# EAGLE board up_down_buttons (EAGLE 7.2.0)
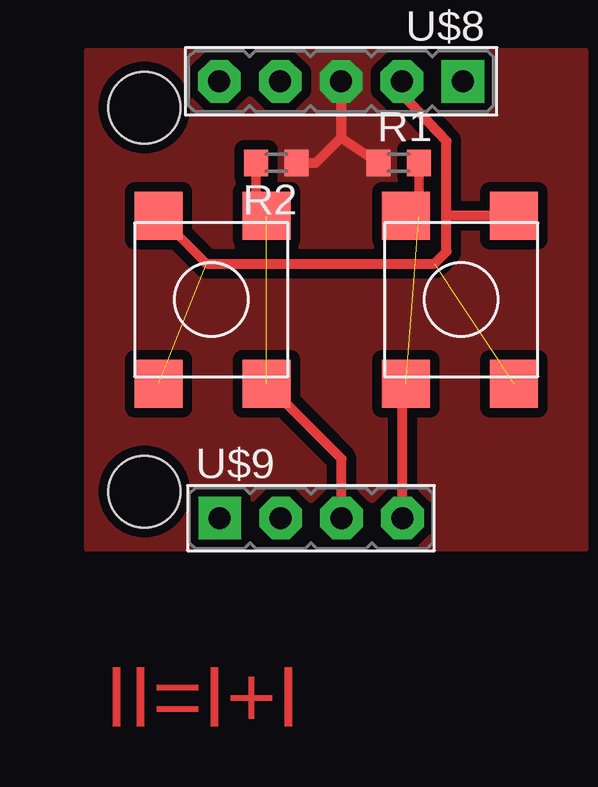
[diagram p0: board, top side]
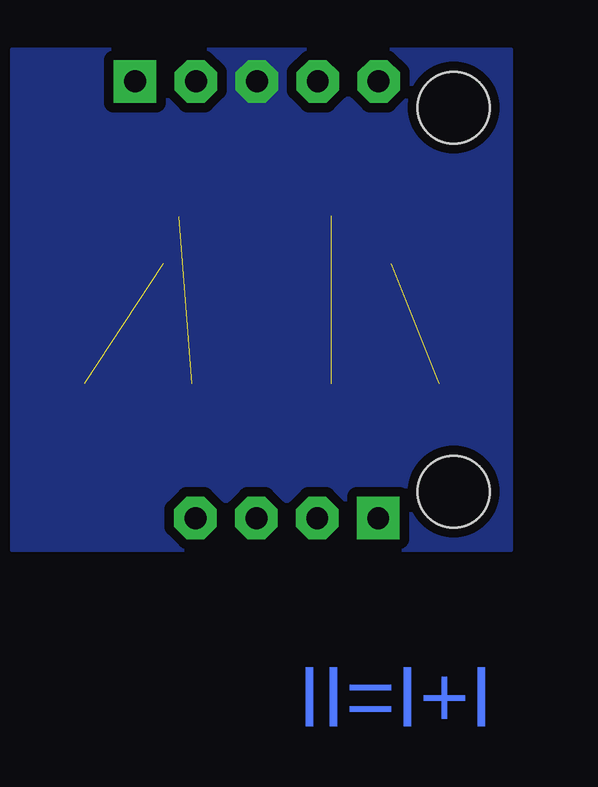
[diagram p1: board, bottom side, seen from below]

No outline drawn. Coordinates in mm, seen from the top.
Copper layers (1*16): Top 0.035mm / dielectric 1.5mm / Bottom 0.035mm
Design rules "default *": minimum track width 10mil, minimum drill 24mil, track to track 8mil, track to pad 8mil, pad to pad 8mil, via to via 8mil, smd to smd 8mil, copper to edge 0mil, drill to drill 1mil, minimum pad ring 10mil, minimum via ring 8mil, stop-mask expansion 4mil, vias tented up to drill 0mil, thermal gap 10mil
Net classes: 0 default: clearance 0.205 mm
Holes 3 mm at 2.5,18.5 2.5,2.5

## Footprints (pad centres in the part's own frame; a part is rotated, then mirrored left to right if it is on the bottom)
R0603 = smd 1 x 1.1: 1 -0.85,0; 2 0.85,0
BUTTON_6.2X6.2 = smd 2 x 2: P$1 -2.21,-3.5; P$2 2.29,-3.5; P$3 -2.21,3.5; P$4 2.29,3.5
JUMPER5M = drill 0.914 pad 1.778 square: 1 -5.08,0 | drill 0.914 pad 1.778 octagon: 2 -2.54,0; 3 0,0; 4 2.54,0; 5 5.08,0
JUMPER4M = drill 0.914 pad 1.778 square: 1 -3.81,0 | drill 0.914 pad 1.778 octagon: 2 -1.27,0; 3 1.27,0; 4 3.81,0

## Placement (x,y rotation side)
R1  100k  [R0603]  13.1,16.2 0 top
R2  100k  [R0603]  8,16.2 180 top
U$1  BUTTON_6.3X6.3  [BUTTON_6.2X6.2]  15.7,10.5 180 top
U$2  BUTTON_6.3X6.3  [BUTTON_6.2X6.2]  5.3,10.5 0 top
U$8  JUMPER5M  [JUMPER5M]  10.7,19.6 180 top
U$9  JUMPER4M  [JUMPER4M]  9.45,1.4 0 top

## Library data of the parts
R1 R2 = resistor
U$1 U$2 U$8 U$9 = !stavebnice03

## Nets
GND: R1.1 R2.1 U$8.3
N$1: R2.2 U$2.P$2 U$2.P$4 U$9.3
N$2: U$1.P$1 U$1.P$3 U$2.P$1 U$2.P$3 U$8.2
N$4: R1.2 U$1.P$2 U$1.P$4 U$9.4

## Tracks (layer width: path | path; a pad name or v marks a point on that pad's centre or on a via)
GND
  Top 0.406: U$8.3 10.7,17.25 | 10.7,17.25 R1.1 | R2.1 9.65,16.2 10.7,17.25
  pour Top (isolate 0.406, rank 2, no thermals): 0.1,0.1 0.1,20.9 20.9,20.9 20.9,0.1
  pour Bottom (isolate 0.406, rank 2, no thermals): 0.1,0.1 0.1,20.9 20.9,20.9 20.9,0.1
N$1  (1 unrouted)
  Top 0.4: 7.65,14.06 U$2.P$4 7.15,14.16 R2.2
  Top 0.406: U$9.3 10.72,3.87 U$2.P$2
N$2  (2 unrouted)
  Top 0.4: U$1.P$1 17.91,13.41 | U$2.P$3 5.09,12
  Top 0.406: U$8.2 13.24,19.07 15.1,17.11 15.1,14 | 5.09,12 14.6,12 15.1,12.5 15.1,14 | U$1.P$1 15.1,14
N$4  (1 unrouted)
  Top 0.4: R1.2 13.95,13.96 U$1.P$2
  Top 0.406: U$1.P$2 13.41,14.39 13.4,14.4 | U$9.4 13.26,6.85 U$1.P$4

## Text on the board
Top: II=I+I
Bottom: II=I+I
Dimension: up-down buttons